# Altium PCB Routed BOARD 3.pcbdoc (part 2 of 7)
Units mil, origin at the board's own origin, x right, y up, seen from the top; angles counter-clockwise.
Board outline 6225 x 7025 mil, 8 copper layers (TopLayer, MidLayer1, MidLayer2, MidLayer3, MidLayer4, MidLayer5, MidLayer6, BottomLayer); 253 components, 548 nets, 2588 pads, 2014 vias.
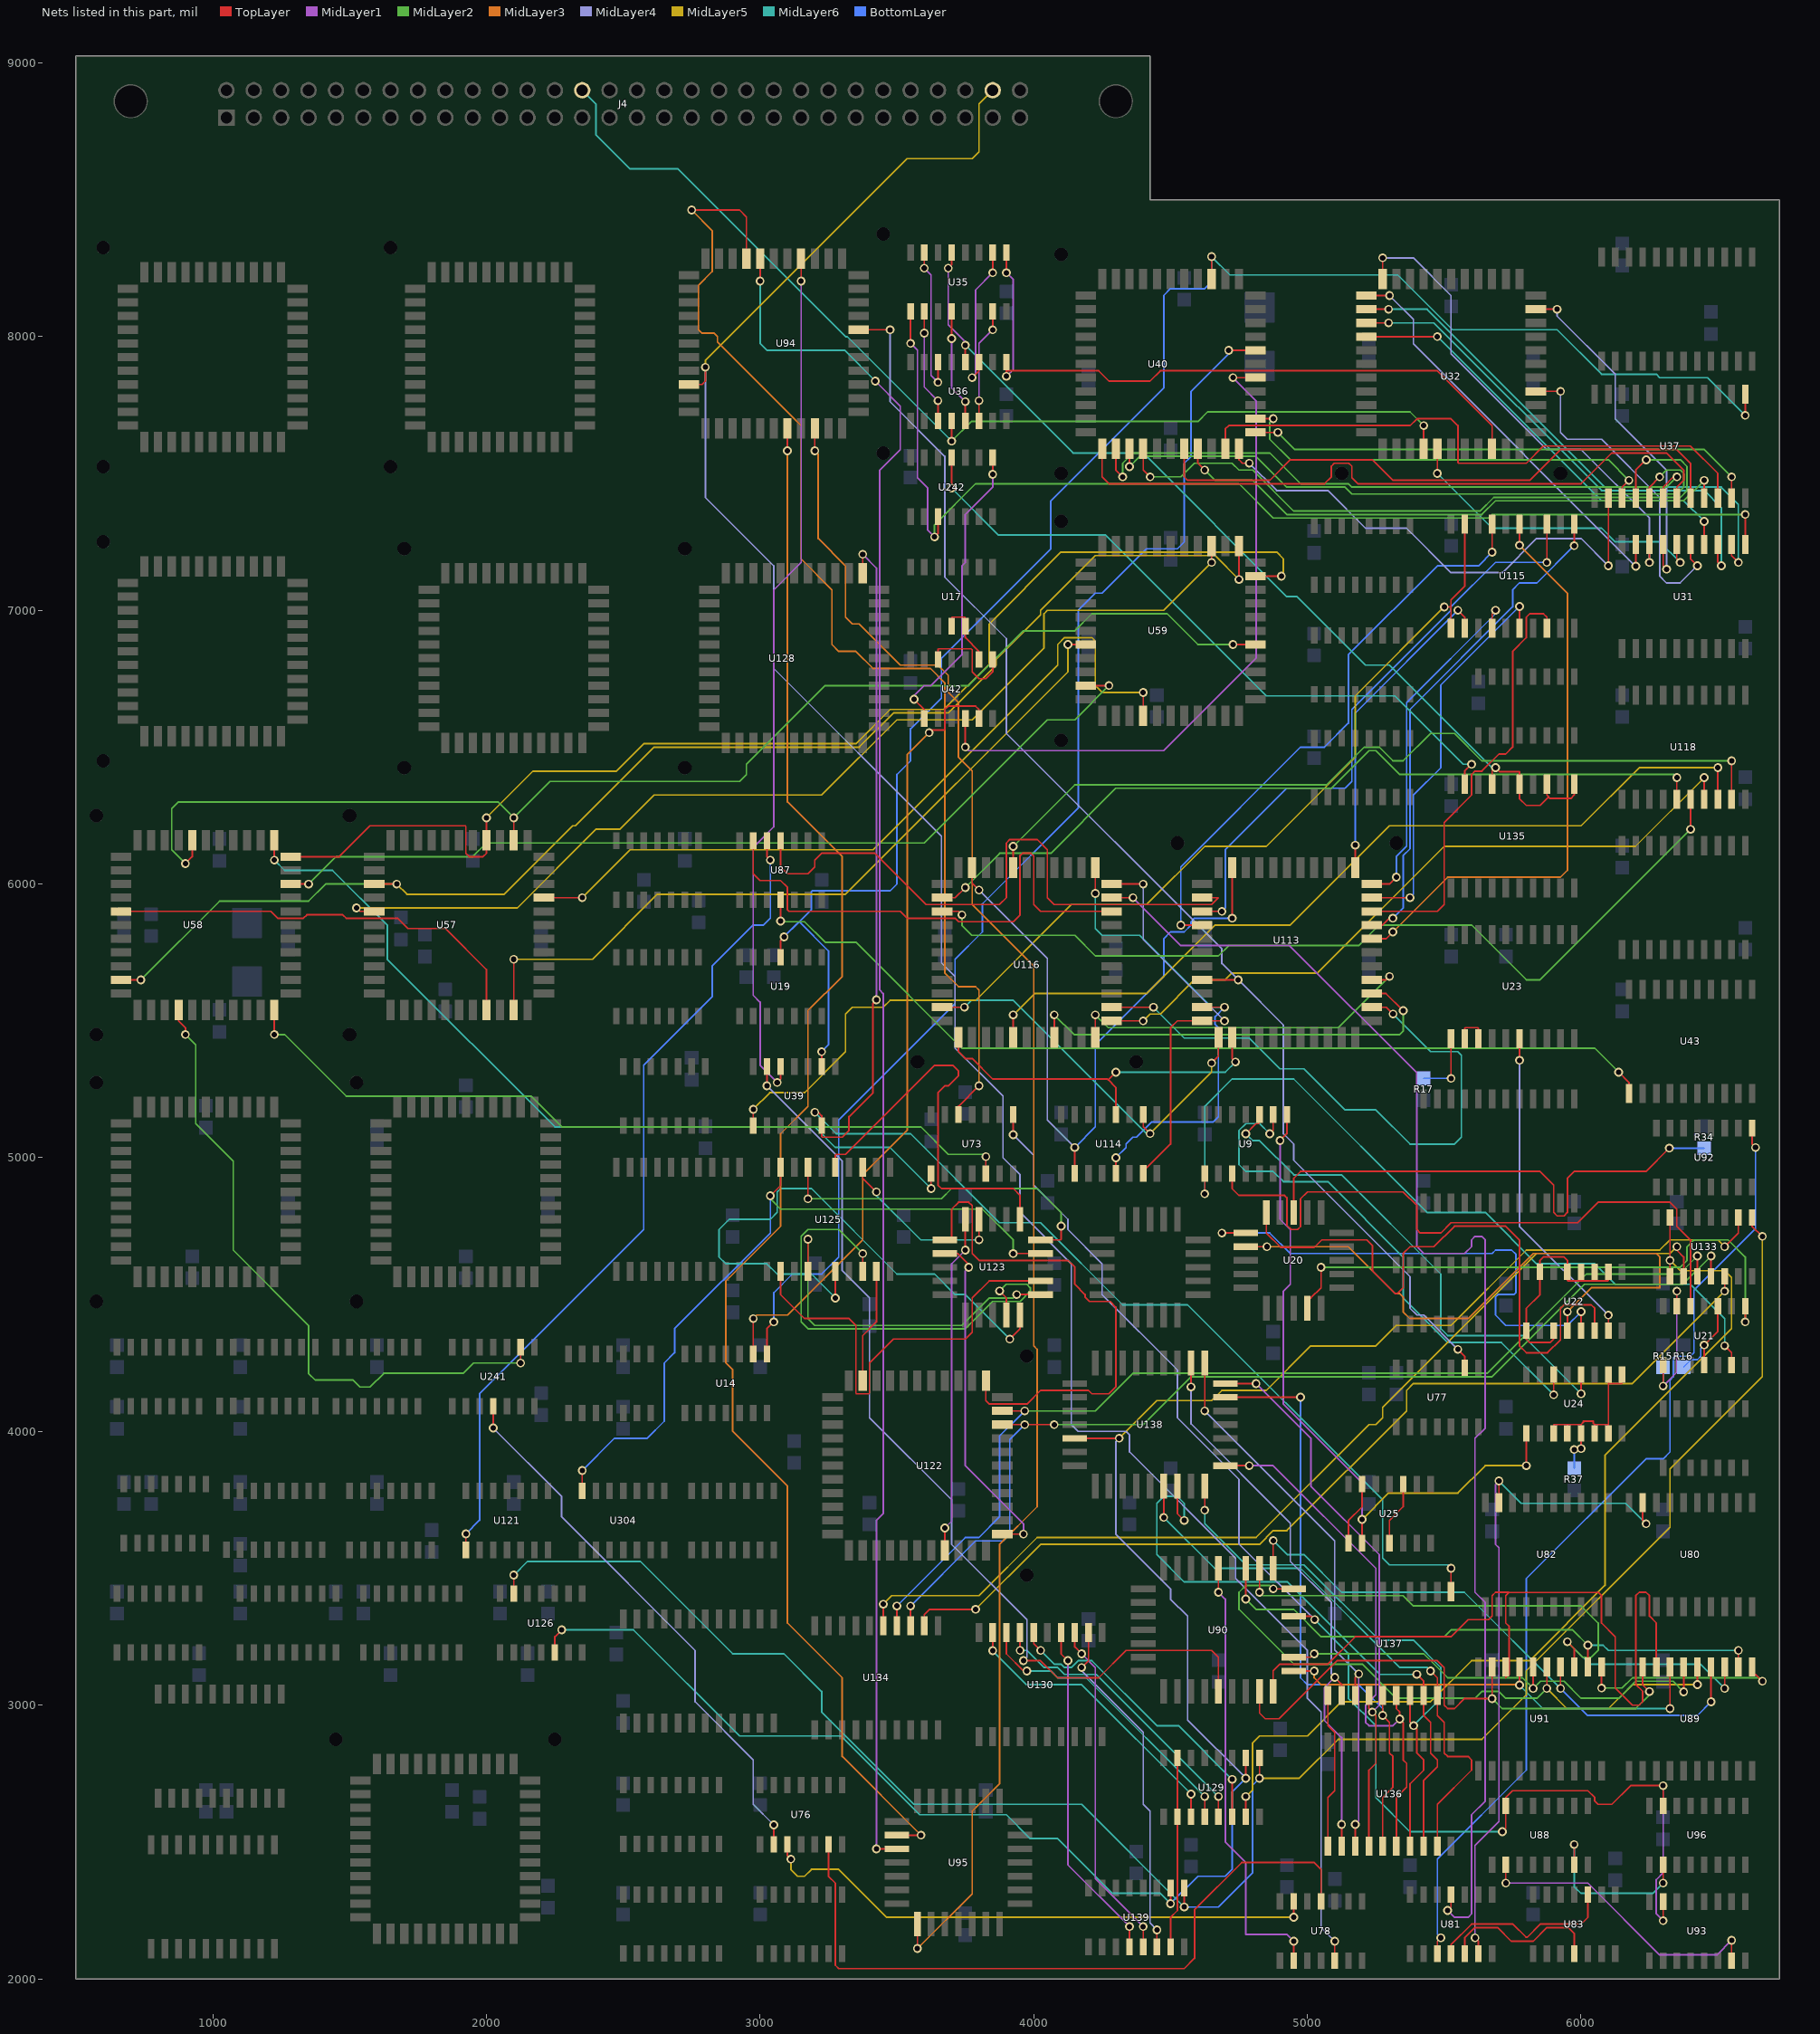
[diagram p8: the nets of this part, all layers, seen from the top]

## Via types
v1: diameter 32, hole 20, TopLayer to BottomLayer, 2014 vias

## Nets (pads, with @x,y where several pads share a name; then routed paths per layer and width w, separated by ;. In a path a pad name is that pad's centre, name@x,y a point inside that pad or via, vN(x,y) a via of type N, cw(c..) or ccw(c..) an arc to the next point about the centre after c; other vN are vias at no path point) (continued)
$11N111: U9.1 U21.6 | length 2878.2
  TopLayer w6: v1(4625,4868) U9.1@4625,4942 ; v1(6525,4313) 6550,4288 U21.6@6550,4242
  MidLayer6 w6: v1(4625,4868) 4625,5187.5 4725,5287.5 4950,5287.5 5437.5,4800 5650,4800 5837.5,4612.5 6050,4612.5 6125,4537.5 6400,4537.5 6525,4412.5 v1(6525,4313)
$11N113: U9.3 U21.12 | length 2462.5
  TopLayer w6: U9.3@4725,4942 4725,4887.5 4750,4862.5 4916.5,4862.5 4925,4854 4925,4753.5 4941,4737.5 4964,4737.5 4975,4748.5 4975,4850 5000,4875 5350,4875 5400,4825 5400,4737.5 5412.5,4725 5487.5,4725 5525,4762.5 5987.5,4762.5 6062.5,4837.5 6325,4837.5 6350,4812.5 6350,4750 6400,4700 U21.12@6400,4458
$11N119: R15.2 U21.1 U21.13 | length 642.7
  TopLayer w6: U21.13@6350,4458 v1(6350,4512.5) ; v1(6300,4166) U21.1@6300,4242 v1(6300,4166)
  MidLayer1 w6: v1(6300,4166) 6350,4216 v1(6350,4512.5)
  BottomLayer w6: v1(6300,4166) R15.2@6300,4235
  other v1: 6300,4166
$11N122: R16.2 U21.4 U21.10 | length 436
  TopLayer w6: U21.10@6500,4458 6500,4366 v1(6450,4316) ; v1(6450,4316) U21.4@6450,4242 v1(6450,4316)
  BottomLayer w6: R16.2@6375,4235 6402.5,4262.5 6425,4262.5 6437.5,4275 6437.5,4303.5 v1(6450,4316)
$11N125: U20.2 U21.8 | length 2120.1
  TopLayer w6: U20.2@5000,4450 5000,4487.5 5012.5,4487.5 5050,4525 v1(5050,4600) ; v1(6600,4400) U21.8@6600,4458
  MidLayer2 w6: v1(5050,4600) 6362.5,4600 6387.5,4625 6387.5,4675 6412.5,4700 6537.5,4700 6600,4637.5 v1(6600,4400)
$11N127: U20.15 U22.4 | length 2312.3
  TopLayer w6: U20.15@4775,4675 v1(4852,4675) ; U22.4@5950,4368 v1(5950,4437)
  MidLayer3 w6: v1(4852,4675) 5150,4675 5321.5,4503.5 5337.5,4503.5 5350,4491 5350,4437.5 5375,4412.5 5587.5,4412.5 5825,4650 6275,4650 6288,4637 6288,4525 6038,4525 v1(5950,4437)
$11N129: U20.14 U22.5 | length 1910.7
  TopLayer w6: v1(4687.5,4725) U20.14@4775,4725 ; U22.5@6000,4368 v1(6000,4437.5)
  BottomLayer w6: v1(4687.5,4725) 4862.5,4725 4937.5,4650 5675,4650 5687.5,4662.5 5746.5,4662.5 5762.5,4646.5 5762.5,4507.5 5755,4500 5696,4500 5687.5,4491.5 5687.5,4425 5725,4387.5 5950,4387.5 v1(6000,4437.5)
$11N131: U20.13 U22.6 | length 2264.6
  TopLayer w6: U20.13@4850,4800 4850,4725 4902.5,4672.5 5025,4672.5 5052.5,4700 5217.5,4700 5237.5,4680 5237.5,4587.5 5321.5,4503.5 5328.5,4503.5 5350,4525 5350,4650 5375,4675 5462.5,4675 5537.5,4750 5725,4750 5775,4700 5775,4312.5 5800,4287.5 5877.5,4287.5 5925,4335 5925,4450 5937.5,4462.5 6037.5,4462.5 6050,4450 U22.6@6050,4368
$11N139: U23.2 U23.3 | length 127.1
  TopLayer w6: U23.2@5575,5435 5575,5472.5 5577.5,5475 5622.5,5475 5625,5472.5 U23.3@5625,5435
$11N163: R17.1 U23.1 | length 245
  TopLayer w6: v1(5525,5290) U23.1@5525,5435
  BottomLayer w6: R17.1@5425,5290 v1(5525,5290)
$11N165: U22.1 U22.3 U22.10 U22.11 U22.12 U22.13 U22.15 | length 950.6
  TopLayer w6: U22.3@5900,4368 5900,4337.5 5887.5,4325 5812.5,4325 5800,4337.5 U22.1@5800,4368 5800,4450 5850,4500 U22.15@5850,4583 5850,4625 5862.5,4637.5 5937.5,4637.5 5950,4625 U22.13@5950,4583 5950,4552.5 5952.5,4550 5997.5,4550 ; U22.10@6100,4583 6100,4552.5 6097.5,4550 6047.5,4550 ; 5997.5,4550 6000,4552.5 ; 5997.5,4550 6000,4552.5 ; 5997.5,4550 6047.5,4550 ; 6000,4552.5 U22.12@6000,4583 6000,4552.5 ; 6047.5,4550 6050,4552.5 ; 6047.5,4550 6050,4552.5 ; 6050,4552.5 U22.11@6050,4583 6050,4552.5
$11N242: R34.1 U20.11 | length 1937
  TopLayer w6: U20.11@4950,4800 4950,4925 4975,4950 5850,4950 5900,4900 5900,4800 5912.5,4787.5 5937.5,4787.5 5950,4800 5950,4925 5975,4950 6237.5,4950 v1(6322.5,5035)
  BottomLayer w6: v1(6322.5,5035) R34.1@6450,5035
$11N244: U22.7 U23.6 | length 1201.6
  TopLayer w6: v1(5775,5356) U23.6@5775,5435 ; U22.7@6100,4368 v1(6100,4425)
  MidLayer4 w6: v1(5775,5356) 5775,4750 v1(6100,4425)
$11N255: U9.10 U24.12 | length 1903.2
  TopLayer w6: v1(4775,5087.5) 4812.5,5125 4822.5,5125 4825,5127.5 U9.10@4825,5158 ; v1(6000,4137.5) U24.12@6000,4208
  MidLayer6 w6: v1(4775,5087.5) 4800,5062.5 4825.5,5062.5 4950.5,4937.5 5125,4937.5 5487.5,4575 5487.5,4375 5512.5,4350 5787.5,4350 v1(6000,4137.5)
$11N257: U9.8 U24.1 U25.2 | length 2607.2
  TopLayer w6: v1(4900,5063) 4925,5088 U9.8@4925,5158 ; v1(5800,3875) U24.1@5800,3993 ; U25.2@5200,3592 v1(5200,3678.5) U25.2@5200,3592
  MidLayer1 w6: v1(4900,5063) 4900,4775 4937.5,4737.5 4937.5,4537.5 4912.5,4512.5 4912.5,4100 5200,3812.5 v1(5200,3678.5)
  MidLayer5 w6: v1(5200,3678.5) 5296.5,3775 5550,3775 5650,3875 v1(5800,3875)
  other v1: 5200,3678.5
$11N266: U25.1 U25.13 | length 236.7
  TopLayer w6: U25.1@5150,3592 5150,3675 5200,3725 U25.13@5200,3808
$11N268: U25.4 U25.10 | length 236.7
  TopLayer w6: U25.4@5300,3592 5300,3675 5350,3725 U25.10@5350,3808
$11N276: R37.2 U24.3 U24.4 U24.5 U24.6 U24.7 U24.9 U24.10 | length 954.2
  TopLayer w6: U24.3@5900,3993 5900,4025 5950,4025 ; v1(6000,3937.5) U24.5@6000,3993 ; U24.9@6150,4208 6150,4177.5 6147.5,4175 6102.5,4175 ; 5950,4025 6000,4025 ; 5950,4025 U24.4@5950,3993 5950,4025 ; U24.5@6000,3993 6000,4025 ; U24.5@6000,3993 6000,4025 ; 6000,4025 6008,4033 6008,4037.5 6044.5,4037.5 6044.5,4030.5 6050,4025 ; 6050,4025 U24.6@6050,3993 6050,4025 ; 6050,4025 6100,4025 U24.7@6100,3993 6100,4172.5 6102.5,4175 ; 6100,4177.5 6102.5,4175 ; 6100,4177.5 U24.10@6100,4208 6100,4177.5 ; 6100,4177.5 6102.5,4175
  MidLayer6 w6: v1(5975,3934) 5978.5,3937.5 v1(6000,3937.5)
  BottomLayer w6: R37.2@5975,3865 v1(5975,3934)
$11N290: U9.9 U24.14 | length 1999.3
  TopLayer w6: v1(4862.5,5087.5) 4875,5100 U9.9@4875,5158 ; v1(5900,4134) U24.14@5900,4208
  MidLayer6 w6: v1(4862.5,5087.5) 4825,5125 4775,5125 4750,5100 4750,4975 4775,4950 4875,4950 4912.5,4912.5 5075,4912.5 5350,4637.5 5350,4487.5 5512.5,4325 5709,4325 v1(5900,4134)
$11N419: U42.8 U42.12 | length 385.9
  TopLayer w6: U42.12@3650,6820.5 3650,6857 3652.5,6859.5 3771,6859.5 3775,6855.5 3775,6775 3800,6750 3825,6750 3850,6775 U42.8@3850,6820.5
$11N424: U17.4 U17.5 U42.9 | length 255.3
  TopLayer w6: U17.4@3700,6942 3700,6972.5 3702.5,6975 3747.5,6975 3750,6972.5 U17.5@3750,6942 3750,6900 3800,6850 U42.9@3800,6820.5
$12N175: U35.5 U36.4 U135.11 U135.13 U135.15 U135.17 | length 3759.7
  TopLayer w6: v1(3687.5,8250) 3700,8262.5 U35.5@3700,8307 ; U135.11@5975,6365 5975,6325 5962.5,6312.5 5887.5,6312.5 5875,6325 ; 5675,6412.5 U135.17@5675,6365 5675,6412.5 ; 5675,6412.5 v1(5687.5,6425) ; 5675,6412.5 v1(5687.5,6425) ; v1(5687.5,6425) 5702.5,6410 5775,6410 U135.15@5775,6365 5775,6312.5 5800,6287.5 5850,6287.5 5881.25,6318.75 5875,6325 ; 5875,6325 U135.13@5875,6365 5875,6325 ; U36.4@3750,7907 v1(3750,7968.5) U36.4@3750,7907
  MidLayer1 w6: v1(3687.5,8250) 3687.5,8043.5 3750,7981 v1(3750,7968.5)
  MidLayer6 w6: v1(3750,7968.5) 4143.5,7575 4400,7575 4925,7050 4962.5,7050 5212.5,6800 5300,6800 5675,6425 v1(5687.5,6425)
  other v1: 3750,7968.5
$12N232: J4.28 U32.32 U36.12 | length 3970
  TopLayer w6: U32.32@5425,7590 v1(5425,7675) ; v1(3700,7618) U36.12@3700,7692 v1(3700,7618)
  MidLayer2 w6: v1(3700,7618) 3772,7690 4600,7690 4635,7725 5375,7725 v1(5425,7675)
  MidLayer6 w6: J4.28@2350,8900 2400,8850 2400,8737.5 2525,8612.5 2700,8612.5 3312.5,8000 3318,8000 v1(3700,7618)
  other v1: 3700,7618
$12N239: U135.19 U242.11 | length 2512.3
  TopLayer w6: v1(3700,7446.5) U242.11@3700,7558 ; U135.19@5575,6365 5575,6412.5 v1(5600,6437.5)
  MidLayer6 w6: v1(3700,7446.5) 3871.5,7275 4262.5,7275 4850,6687.5 5319.5,6687.5 5569.5,6437.5 v1(5600,6437.5)
$12N293: U35.2 U36.3 | length 555.4
  TopLayer w6: v1(3775,7850) 3800,7875 U36.3@3800,7907 ; v1(3850,8233) U35.2@3850,8307
  MidLayer1 w6: v1(3775,7850) 3787.5,7862.5 3787.5,8170.5 v1(3850,8233)
$12N297: U35.7 U36.6 | length 568.7
  TopLayer w6: v1(3600,8250) U35.7@3600,8307 ; v1(3650,7833) U36.6@3650,7907
  MidLayer1 w6: v1(3600,8250) 3625,8225 3625,7858 v1(3650,7833)
$12N299: U35.10 U36.11 | length 420.7
  TopLayer w6: v1(3600,8012.5) U35.10@3600,8092 ; U36.11@3650,7692 v1(3650,7766)
  MidLayer1 w6: v1(3600,8012.5) 3600,7816 v1(3650,7766)
$12N301: U35.12 U36.13 | length 420.7
  TopLayer w6: v1(3700,7993) U35.12@3700,8092 ; U36.13@3750,7692 v1(3750,7762.5)
  MidLayer1 w6: v1(3700,7993) 3700,7812.5 v1(3750,7762.5)
$12N303: U35.15 U36.14 | length 420.7
  TopLayer w6: U36.14@3800,7692 v1(3800,7766) ; v1(3850,8025) U35.15@3850,8092
  MidLayer1 w6: v1(3800,7766) 3800,7975 v1(3850,8025)
$12N312: U32.37 U35.1 U36.1 | length 2530.6
  TopLayer w6: v1(3900,7855) U36.1@3900,7907 3900,7875 4237.5,7875 4275,7837.5 4425,7837.5 4462.5,7875 5475,7875 5675,7675 U32.37@5675,7590 ; v1(3900,8233) U35.1@3900,8307
  MidLayer1 w6: v1(3900,7855) 3925,7880 3925,8208 v1(3900,8233)
$12N316: U31.11 U35.9 U242.3 | length 4254.7
  TopLayer w6: v1(3550,7975) U35.9@3550,8092 ; U31.11@6600,7240 v1(6600,7350) ; 3650,7280.5 v1(3637.5,7268) 3650,7280.5 ; 3650,7280.5 U242.3@3650,7342 3650,7280.5
  MidLayer1 w6: v1(3550,7975) 3575,7950 3575,7484 3612.5,7446.5 3612.5,7293 v1(3637.5,7268)
  MidLayer2 w6: v1(3637.5,7268) 3637.5,7312.5 3787.5,7462.5 4750,7462.5 4875,7337.5 5662.5,7337.5 5675,7350 v1(6600,7350)
  other v1: 3637.5,7268
$12N331: U31.19 U32.18 | length 1525.8
  TopLayer w6: U32.18@5215,8150 v1(5300,8150) ; v1(6200,7161) U31.19@6200,7240
  MidLayer4 w6: v1(5300,8150) 5387.5,8062.5 5387.5,7973.5 v1(6200,7161)
$12N333: U31.18 U32.17 | length 1798
  TopLayer w6: U32.17@5275,8210 v1(5275,8287.5) ; v1(6250,7175) U31.18@6250,7240
  MidLayer4 w6: v1(5275,8287.5) 5387.5,8287.5 5525,8150 5525,7937.5 5875,7587.5 6000,7587.5 6250,7337.5 v1(6250,7175)
$12N335: U31.17 U32.5 | length 1288.4
  TopLayer w6: U32.5@5835,8100 v1(5912.5,8100) ; U31.17@6300,7240 6300,7162.5 v1(6312.5,7150)
  MidLayer4 w6: v1(5912.5,8100) 5912.5,8075 6125,7862.5 6125,7700 6312.5,7512.5 v1(6312.5,7150)
$12N337: U31.16 U32.33 | length 1182.3
  TopLayer w6: v1(5475,7500) U32.33@5475,7590 ; U31.16@6350,7240 6350,7187.5 v1(6362.5,7175)
  MidLayer6 w6: v1(5475,7500) 5675,7300 6075,7300 6125,7250 6287.5,7250 v1(6362.5,7175)
$12N339: U31.15 U32.43 | length 1249.7
  TopLayer w6: U32.43@5835,7800 v1(5925,7800) ; U31.15@6400,7240 6400,7188 v1(6425,7163)
  MidLayer4 w6: v1(5925,7800) 5925,7650 5950,7625 6075,7625 6287.5,7412.5 6287.5,7125 6312.5,7100 6362,7100 v1(6425,7163)
$12N341: U31.14 U32.21 | length 1599.6
  TopLayer w6: U32.21@5215,8000 v1(5475,8000) ; U31.14@6450,7240 v1(6450,7325)
  MidLayer6 w6: v1(5475,8000) 6075,7400 6375,7400 v1(6450,7325)
$12N343: U31.13 U32.20 | length 1872.3
  TopLayer w6: U32.20@5215,8050 v1(5297,8050) ; U31.13@6500,7240 6500,7175 v1(6512.5,7162.5)
  MidLayer6 w6: v1(5297,8050) 5462.5,8050 6075,7437.5 6450,7437.5 6512.5,7375 v1(6512.5,7162.5)
$12N345: U31.12 U32.19 | length 1943
  TopLayer w6: U32.19@5215,8100 v1(5297,8100) ; U31.12@6550,7240 6550,7200 v1(6575,7175)
  MidLayer6 w6: v1(5297,8100) 5437.5,8100 6087.5,7450 6512.5,7450 6575,7387.5 v1(6575,7175)
$12N362: U37.11 U40.7 | length 1884.8
  TopLayer w6: U40.7@4810,7650 v1(4892,7650) ; U37.11@6550,7410 v1(6550,7487.5)
  MidLayer2 w6: v1(4892,7650) 4954.5,7587.5 6450,7587.5 v1(6550,7487.5)
$12N364: U37.2 U40.6 | length 1901.6
  TopLayer w6: U40.6@4750,7590 4750,7550 4762.5,7537.5 v1(4787.5,7537.5) ; v1(6100,7162.5) U37.2@6100,7410
  MidLayer4 w6: v1(4787.5,7537.5) 4887.5,7437.5 5075,7437.5 5212.5,7300 5362.5,7300 5525,7137.5 5712.5,7137.5 5837.5,7262.5 6000,7262.5 v1(6100,7162.5)
$12N366: U37.9 U40.3 | length 2096.9
  TopLayer w6: U40.3@4600,7590 4600,7537.5 v1(4625,7512.5) ; U37.9@6450,7410 v1(6450,7475)
  MidLayer2 w6: v1(4625,7512.5) 4662.5,7475 4800,7475 4925,7350 5637.5,7350 5687.5,7400 6375,7400 v1(6450,7475)
$12N368: U37.10 U40.5 | length 2191.7
  TopLayer w6: U40.5@4700,7590 4700,7662.5 4712.5,7675 5375,7675 5400,7700 5525,7700 5550,7675 5550,7540 5552.5,7537.5 5800,7537.5 5862.5,7600 6400,7600 6500,7500 U37.10@6500,7410
$12N370: U37.8 U40.2 | length 2214.6
  TopLayer w6: U40.2@4550,7590 4550,7487.5 4562.5,7475 4862.5,7475 4937.5,7550 5237.5,7550 5312.5,7475 5812.5,7475 5925,7587.5 6350,7587.5 6400,7537.5 U37.8@6400,7410
$12N372: U37.7 U40.40 | length 2533.1
  TopLayer w6: U40.40@4250,7590 4250,7487.5 4275,7462.5 5062.5,7462.5 5087.5,7487.5 5087.5,7526.5 5098.5,7537.5 5151.5,7537.5 5162.5,7526.5 5162.5,7484 5184,7462.5 6000,7462.5 6112.5,7575 6312.5,7575 6375,7512.5 6375,7475 6350,7450 U37.7@6350,7410
$12N374: U37.6 U40.41 | length 2376.2
  TopLayer w6: U40.41@4300,7590 4300,7512.5 v1(4325,7487.5) ; U37.6@6300,7410 6300,7450 6337.5,7487.5 v1(6350,7487.5)
  MidLayer2 w6: v1(4325,7487.5) 4325,7537.5 4362.5,7575 4862.5,7575 4975,7462.5 5150,7462.5 5162.5,7450 6312.5,7450 v1(6350,7487.5)
$12N376: U37.5 U40.42 | length 2418.9
  TopLayer w6: v1(4350,7525) U40.42@4350,7590 ; U37.5@6250,7410 6250,7450 v1(6287.5,7487.5)
  MidLayer2 w6: v1(4350,7525) 4387.5,7562.5 4812.5,7562.5 4925,7450 5137.5,7450 5162.5,7425 6350,7425 6375,7450 6375,7500 6362.5,7512.5 6312.5,7512.5 v1(6287.5,7487.5)
$12N378: U37.4 U40.43 | length 2602.4
  TopLayer w6: U40.43@4400,7590 4400,7513 v1(4425.5,7487.5) ; U37.4@6200,7410 6200,7512 v1(6238,7550)
  MidLayer2 w6: v1(4425.5,7487.5) 4537.5,7487.5 4587.5,7537.5 4725,7537.5 4750,7512.5 4800,7512.5 4950,7362.5 5631,7362.5 5681,7412.5 6362.5,7412.5 6387.5,7437.5 6387.5,7525 6362.5,7550 v1(6238,7550)
$12N380: U37.3 U40.8 | length 1595.2
  TopLayer w6: U40.8@4810,7700 v1(4875,7700) ; U37.3@6150,7410 6150,7450 v1(6175,7475)
  MidLayer2 w6: v1(4875,7700) 4862.5,7687.5 4862.5,7625 4937.5,7550 6100,7550 v1(6175,7475)
$12N382: U19.11 U37.13 U39.2 U40.20 | length 6624.9
  TopLayer w6: U39.2@3225,5333 v1(3225,5387.5) ; v1(6600,7712.5) U37.13@6600,7790 ; 3075,5794.5 U19.11@3075,5733 3075,5794.5 ; 3075,5794.5 v1(3087.5,5807) 3075,5794.5 ; U40.20@4650,8210 v1(4650,8292) U40.20@4650,8210
  MidLayer6 w6: v1(4650,8292) 4717,8225 5330.5,8225 5530.5,8025 5912.5,8025 6075,7862.5 6275,7862.5 6287.5,7850 6462.5,7850 v1(6600,7712.5)
  BottomLayer w6: v1(3225,5387.5) 3250,5412.5 3250,5755.5 3143,5862.5 v1(3087.5,5807) 3187.5,5907 3187.5,5972.5 3190,5975 3475,5975 3500,6000 3500,6400 3550,6450 3550,6567 3662.5,6679.5 3662.5,6825 4062.5,7225 4062.5,7400 4475,7812.5 4475,8150 4500,8175 4625,8175 4650,8200 v1(4650,8292)
  other v1: 3087.5,5807 4650,8292
$12N497: U14.9 U42.6 | length 2905.1
  TopLayer w6: U14.9@2975,4283 v1(2975,4412.5) ; v1(3618,6553) 3627.5,6562.5 3672.5,6562.5 3675,6565 3675,6637.5 3687.5,6650 3787.5,6650 3800,6637.5 U42.6@3800,6604.5
  MidLayer3 w6: v1(2975,4412.5) 2987.5,4425 3100,4425 3375,4700 3375,4937.5 3537.5,5100 3537.5,6472.5 v1(3618,6553)
$12N503: U14.8 U40.13 | length 4606.7
  TopLayer w6: U14.8@3025,4283 3025,4375 v1(3050,4400) ; v1(4712.5,7950) U40.13@4810,7950
  BottomLayer w6: v1(3050,4400) 3050,4507 3118,4575 3225,4575 3287.5,4637.5 3287.5,5137.5 3712.5,5562.5 3712.5,5725 3812.5,5825 3812.5,5927.5 4162.5,6277.5 4162.5,7000 4225,7062.5 4250,7062.5 4412.5,7225 4525,7225 4550,7250 4550,7537.5 4575,7562.5 4575,7800 4712.5,7937.5 v1(4712.5,7950)
$12N505: U40.11 U42.5 | length 2454
  TopLayer w6: v1(3750,6500) U42.5@3750,6604.5 ; v1(4728,7850) U40.11@4810,7850
  MidLayer1 w6: v1(3750,6500) 3762.5,6487.5 4475,6487.5 4812.5,6825 4812.5,7765.5 v1(4728,7850)
$12N537: U42.2 U242.8 | length 1102.8
  TopLayer w6: v1(3562.5,6675) 3600,6637.5 U42.2@3600,6604.5 ; v1(3850,7497) U242.8@3850,7558
  MidLayer1 w6: v1(3562.5,6675) 3562.5,6687.5 3600,6725 3625,6725 3737.5,6837.5 3737.5,7162.5 3750,7175 3750,7350 3850,7450 v1(3850,7497)
$14N494: U57.5 U59.35 | length 2809.9
  TopLayer w6: U57.5@2100,5540 v1(2100,5725) ; v1(4125,6875) U59.35@4190,6875
  MidLayer5 w6: v1(2100,5725) 2387.5,5725 2625,5962.5 3312.5,5962.5 4125,6775 v1(4125,6875)
$14N504: U57.21 U58.17 U59.16 | length 4571
  TopLayer w6: U58.17@1285,6100 1462.5,6100 1575,6212.5 1922.5,6212.5 1925,6210 1925,6112.5 1937.5,6100 1987.5,6100 2000,6112.5 U57.21@2000,6160 v1(2000,6242) ; U59.16@4810,7125 v1(4905,7125)
  MidLayer5 w6: v1(2000,6242) 2170.5,6412.5 2475,6412.5 2575,6512.5 3350,6512.5 3475,6637.5 3671,6637.5 3837.5,6804 3837.5,6950 4100,7212.5 4887.5,7212.5 4912.5,7187.5 4912.5,7132.5 v1(4905,7125)
$14N518: U57.14 U59.43 | length 2890.5
  TopLayer w6: U57.14@2210,5950 v1(2350,5950) ; U59.43@4400,6615 v1(4400,6700)
  MidLayer5 w6: v1(2350,5950) 2525,6125 3412.5,6125 4087.5,6800 4087.5,6875 4112.5,6900 4212.5,6900 4225,6887.5 4225,6725 4250,6700 v1(4400,6700)
$14N521: U57.33 U59.20 | length 3851.3
  TopLayer w6: v1(1525,5912.5) 1537.5,5900 U57.33@1590,5900 ; v1(4650,7175) U59.20@4650,7235
  MidLayer5 w6: v1(1525,5912.5) 2112.5,5912.5 2400,6200 2487.5,6200 2612.5,6325 3225,6325 3500,6600 3775,6600 4037.5,6862.5 4037.5,6987.5 4050,7000 4475,7000 v1(4650,7175)
$14N660: U58.43 U241.9 | length 2414.2
  TopLayer w6: U58.43@875,5540 875,5500 900,5475 v1(900,5450) ; v1(2125,4250) U241.9@2125,4308
  MidLayer2 w6: v1(900,5450) 937.5,5412.5 937.5,5125 1075,4987.5 1075,4662.5 1350,4387.5 1350,4212.5 1375,4187.5 1512.5,4187.5 1537.5,4162.5 1575,4162.5 1625,4212.5 1915.5,4212.5 1953,4250 v1(2125,4250)
$14N672: U57.31 U58.38 U59.18 | length 5102.5
  TopLayer w6: U58.38@665,5650 v1(737.5,5650) ; v1(4750,7112.5) U59.18@4750,7235 ; U57.31@1590,6000 v1(1672,6000) U57.31@1590,6000
  MidLayer2 w6: v1(737.5,5650) 1025,5937.5 1350,5937.5 1412.5,6000 v1(1672,6000)
  MidLayer5 w6: v1(1672,6000) 1709.5,5962.5 2065,5962.5 2315,6212.5 2325,6212.5 2612.5,6500 3362.5,6500 3487.5,6625 3687.5,6625 3862.5,6800 3862.5,6820.5 4025,6983 4025,6999.5 4225.5,7200 4662.5,7200 v1(4750,7112.5)
  other v1: 1672,6000
$14N674: U57.3 U58.33 | length 1580.9
  TopLayer w6: U58.33@665,5900 1212.5,5900 1237.5,5875 1331.5,5875 1344,5887.5 1475,5887.5 1487.5,5875 1675,5875 1712.5,5837.5 1850,5837.5 2000,5687.5 U57.3@2000,5540
$14N676: U57.19 U58.24 U59.11 | length 4851.8
  TopLayer w6: v1(900,6075) 925,6100 U58.24@925,6160 ; v1(4728,6875) U59.11@4810,6875 ; U57.19@2100,6160 v1(2100,6242) U57.19@2100,6160
  MidLayer2 w6: v1(900,6075) 850,6125 850,6275 875,6300 2042,6300 v1(2100,6242) 2233,6375 2925,6375 2950,6400 2950,6437.5 3237.5,6725 3762.5,6725 3962.5,6925 4150,6925 4212.5,6987.5 4487.5,6987.5 4600,6875 v1(4728,6875)
  other v1: 2100,6242
$14N914: U58.18 U73.1 | length 3097.3
  TopLayer w6: v1(1225,6087.5) U58.18@1225,6160 ; v1(3625,4887.5) U73.1@3625,4942
  MidLayer6 w6: v1(1225,6087.5) 1262.5,6050 1437.5,6050 1637.5,5850 1637.5,5725 2250,5112.5 3200,5112.5 3275,5037.5 3475,5037.5 v1(3625,4887.5)
$14N989: U58.6 U73.5 | length 2936.7
  TopLayer w6: v1(1225,5450) U58.6@1225,5540 ; U73.5@3825,4942 v1(3825,5004)
  MidLayer2 w6: v1(1225,5450) 1262.5,5450 1487.5,5225 2162.5,5225 2275,5112.5 3587.5,5112.5 3687.5,5012.5 3816.5,5012.5 v1(3825,5004)
$14N1063: U58.15 U59.38 | length 3375.3
  TopLayer w6: U58.15@1285,6000 v1(1350,6000) ; U59.38@4190,6725 v1(4275,6725)
  MidLayer2 w6: v1(1350,6000) 1450,6100 1950,6100 2000,6150 3600,6150 4050,6600 4150,6600 v1(4275,6725)
$15N52: U89.12 U90.7 U91.12 | length 2228.9
  TopLayer w6: v1(4775,3387.5) U90.7@4775,3500 ; U89.12@6575,3140 v1(6575,3200) ; U91.12@6025,3140 v1(6025,3219) U91.12@6025,3140
  MidLayer2 w6: v1(4775,3387.5) 4812.5,3350 4950,3350 5050,3250 5500,3250 5525,3275 5969,3275 v1(6025,3219)
  MidLayer6 w6: v1(6025,3219) 6081,3219 6100,3200 v1(6575,3200)
  other v1: 6025,3219
$15N54: U89.13 U90.6 U91.13 | length 2546.2
  TopLayer w6: v1(4825,3412.5) U90.6@4825,3500 ; v1(6525,3061) U89.13@6525,3140 ; 5975,3206.5 U91.13@5975,3140 5975,3206.5 ; 5975,3206.5 v1(5950,3231.5) 5975,3206.5
  MidLayer2 w6: v1(4825,3412.5) 4837.5,3400 5350,3400 5387.5,3362.5 6000,3362.5 6062.5,3300 6062.5,3200 6037.5,3175 6006.5,3175 v1(5950,3231.5)
  MidLayer6 w6: v1(5950,3231.5) 6031.5,3150 6436,3150 v1(6525,3061)
  other v1: 5950,3231.5
$15N56: U89.14 U90.5 U91.14 | length 2272.4
  TopLayer w6: U90.5@4875,3500 v1(4875,3601.5) ; v1(6475,3012.5) U89.14@6475,3140 ; v1(5925,3061) U91.14@5925,3140 v1(5925,3061)
  MidLayer6 w6: v1(4875,3601.5) 4926.5,3550 4987.5,3550 5125,3412.5 5573.5,3412.5 v1(5925,3061)
  BottomLayer w6: v1(5925,3061) 6023.5,2962.5 6425,2962.5 v1(6475,3012.5)
  other v1: 5925,3061
$15N58: U89.15 U90.4 U91.15 | length 2413
  TopLayer w6: v1(4875,3425) U90.4@4950,3425 ; v1(6425,3075) U89.15@6425,3140 ; v1(5875,3061) U91.15@5875,3140 v1(5875,3061)
  MidLayer2 w6: v1(4875,3425) 4862.5,3437.5 4775,3437.5 4750,3412.5 4750,3350 4950,3150 5200,3150 5325,3025 5612.5,3025 5637.5,3050 5700,3050 5725,3025 5839,3025 v1(5875,3061)
  MidLayer5 w6: v1(5875,3061) 5948.5,2987.5 6100,2987.5 6187.5,3075 v1(6425,3075)
  other v1: 5875,3061
$15N60: U89.16 U90.31 U91.16 | length 1811
  TopLayer w6: U90.31@4950,3175 5012.5,3175 v1(5025,3187.5) ; v1(6375,3048.5) U89.16@6375,3140 ; v1(5825,3061) U91.16@5825,3140 v1(5825,3061)
  MidLayer2 w6: v1(5025,3187.5) 5425,3187.5 5512.5,3100 5786,3100 v1(5825,3061) 5851.5,3087.5 5937.5,3087.5 6000,3025 6137.5,3025 6200,3087.5 6336,3087.5 v1(6375,3048.5)
  other v1: 5825,3061
$15N62: U89.17 U90.30 U91.17 | length 2526.6
  TopLayer w6: v1(5775,3073.5) U91.17@5775,3140 ; v1(6325,2987.5) U89.17@6325,3140 ; U90.30@4950,3125 v1(5025,3125) U90.30@4950,3125
  MidLayer3 w6: 5025,3100 5050,3075 ; 5025,3100 v1(5025,3125) 5025,3100 ; 5025,3100 5050,3075 ; 5050,3075 v1@5773.5,3075 ; 5050,3075 v1@5773.5,3075 ; v1@5773.5,3075 v1(5775,3073.5) v1@5773.5,3075
  MidLayer6 w6: v1(5775,3073.5) 5861,2987.5 v1(6325,2987.5)
  other v1: 5775,3073.5 5025,3125
$15N64: U89.18 U90.29 U91.18 | length 3394.3
  TopLayer w6: U90.29@4875,3050 4875,3125 4900,3150 5075,3150 5175,3250 5525,3250 5587.5,3312.5 5662.5,3312.5 5675,3325 5675,3400 5687.5,3412.5 5735.5,3412.5 5736.5,3411.5 ; U89.18@6275,3140 6275,3300 6250,3325 6250,3400 6237.5,3412.5 6212.5,3412.5 6200,3400 6200,3076 6225,3051 6225,3012.5 6212.5,3000 6187.5,3000 6125,3062.5 6125,3250 6075,3300 6075,3400 6063.5,3411.5 5736.5,3411.5 ; 5725,3100 U91.18@5725,3140 5725,3100 ; 5725,3100 5737.5,3112.5 ; 5725,3100 5737.5,3112.5 ; 5725,3300 5737.5,3287.5 ; 5725,3300 5725,3400 ; 5725,3300 5737.5,3287.5 ; 5725,3300 5725,3400 ; 5725,3400 5736.5,3411.5 ; 5725,3400 5736.5,3411.5 ; 5737.5,3112.5 5737.5,3287.5 ; 5737.5,3112.5 5737.5,3287.5
$15N66: U89.19 U90.28 U91.19 | length 2150.4
  TopLayer w6: U90.28@4825,3050 4825,2971 4846,2950 4896,2950 5108.5,3162.5 5475,3162.5 5500,3137.5 5500,3000 5512.5,2987.5 5537.5,2987.5 5575,3025 5576,3024 v1(5675,3024) ; U89.19@6225,3140 6225,3075 v1(6250,3050) ; v1(5675,3024) U91.19@5675,3140 v1(5675,3024)
  MidLayer2 w6: v1(5675,3024) 5711.5,2987.5 6200,2987.5 6250,3037.5 v1(6250,3050)
$15N93: U89.11 U91.11 | length 761.1
  TopLayer w6: v1(6075,3062.5) U91.11@6075,3140 ; U89.11@6625,3140 6625,3112.5 6637.5,3112.5 v1(6662.5,3087.5)
  MidLayer2 w6: v1(6075,3062.5) 6150,3062.5 6187.5,3100 6650,3100 v1(6662.5,3087.5)
$15N97: J4.58 U78.5 U94.15 | length 10164
  TopLayer w6: U94.15@2740,7825 2787.5,7825 2800,7837.5 v1(2800,7888) ; U78.5@5100,2067 v1(5100,2137.5)
  MidLayer4 w6: v1(2800,7888) 2800,7412.5 3050,7162.5 3050,6787.5 3662.5,6175 3662.5,5712.5 3712.5,5662.5 3712.5,5400 3887.5,5225 3887.5,5000 3950,4937.5 3950,4800 4137.5,4612.5 4137.5,4025 4162.5,4000 4337.5,4000 4350,3987.5 4350,3925 4737.5,3537.5 4737.5,3462.5 5000,3200 5000,3025 5050,2975 5050,2187.5 v1(5100,2137.5)
  MidLayer5 w6: 2800,7912.5 3537.5,8650 ; 2800,7912.5 v1(2800,7888) 2800,7912.5 ; 2800,7912.5 3537.5,8650 ; 3537.5,8650 3775,8650 ; 3537.5,8650 3775,8650 ; 3775,8650 3800,8675 ; 3775,8650 3800,8675 ; 3800,8675 3800,8850 ; 3800,8675 3800,8850 ; 3800,8850 J4.58@3850,8900 3800,8850
  other v1: 2800,7888
$15N99: U73.8 U88.7 U90.2 U93.7 U96.7 | length 5225.6
  TopLayer w6: v1(3925,5084) U73.8@3925,5158 ; v1(5712.5,2537.5) 5725,2550 U88.7@5725,2632 5725,2662.5 5750,2687.5 6025,2687.5 6050,2662.5 6050,2650 6062.5,2637.5 6112.5,2637.5 6181,2706 v1(6300,2706) ; v1(6300,2212.5) U93.7@6300,2282 ; 5014,3325 v1(5026.5,3312.5) 5014,3325 ; 5014,3325 U90.2@4950,3325 5014,3325 ; v1(6300,2706) U96.7@6300,2632 v1(6300,2706)
  MidLayer1 w6: v1(6300,2212.5) 6275,2237.5 6275,2362.5 6300,2387.5 v1(6300,2706)
  MidLayer4 w6: v1(3925,5084) 4000,5009 4000,4900 4125,4775 4125,4737.5 4250,4612.5 4250,4500 4525,4225 4525,4050 4750,3825 4750,3589 v1(5026.5,3312.5)
  MidLayer6 w6: v1(5026.5,3312.5) 5150,3189 5150,3025 5250,2925 5250,2662.5 5375,2537.5 v1(5712.5,2537.5)
  other v1: 5026.5,3312.5
$15N118: U88.10 U93.15 | length 1096.9
  TopLayer w6: v1(5725,2350) U88.10@5725,2417 ; U93.15@6550,2067 v1(6550,2141)
  MidLayer1 w6: v1(5725,2350) 6025,2350 6287.5,2087.5 6496.5,2087.5 v1(6550,2141)
$15N123: U88.15 U96.10 | length 645.4
  TopLayer w6: U88.15@5975,2417 v1(5975,2491) ; v1(6300,2350) U96.10@6300,2417
  MidLayer6 w6: v1(5975,2491) 5975,2337.5 6000,2312.5 6262.5,2312.5 v1(6300,2350)
$15N155: U73.12 U94.3 | length 4397.1
  TopLayer w6: v1(2750,8462.5) 2925,8462.5 2950,8437.5 U94.3@2950,8285 ; U73.12@3725,5158 3725,5188 v1(3800,5263)
  MidLayer3 w6: v1(2750,8462.5) 2825,8387.5 2825,8237.5 2775,8187.5 2775,8025 2787.5,8012.5 2832,8012.5 2844.5,8000 2844.5,7980.5 3150,7675 3150,7187.5 3262.5,7075 3262.5,6875 3287.5,6850 3350,6850 3412.5,6787.5 3622.5,6787.5 3675,6735 3675,5675 3725,5625 3787.5,5625 3800,5612.5 v1(3800,5263)
$15N211: U77.9 U94.35 U113.3 | length 5055.5
  TopLayer w6: U94.35@3360,8025 v1(3475,8025) ; v1(5550,4300) 5575,4275 U77.9@5575,4233 ; U113.3@4615,5650 v1(4747,5650) U113.3@4615,5650
  MidLayer4 w6: v1(3475,8025) 3475,7762.5 3675,7562.5 3675,7121.5 3900,6896.5 3900,6550 4687.5,5762.5 4687.5,5709.5 v1(4747,5650) 4912.5,5484.5 4912.5,5087.5 4950,5050 4950,4990.5 5375,4565.5 5375,4450 5400,4425 5425,4425 v1(5550,4300)
  other v1: 4747,5650
$15N244: U76.3 U78.13 | length 2085.9
  TopLayer w6: U76.3@3100,2492 3100,2450 v1(3112.5,2437.5) ; v1(4950,2225) U78.13@4950,2283
  MidLayer5 w6: v1(3112.5,2437.5) 3112.5,2400 3137.5,2375 3162.5,2375 3187.5,2400 3287.5,2400 3462.5,2225 v1(4950,2225)
$15N262: U76.2 U241.4 | length 2024.6
  TopLayer w6: v1(2025,4012.5) U241.4@2025,4092 ; U76.2@3050,2492 v1(3050,2562.5)
  MidLayer4 w6: v1(2025,4012.5) 2275,3762.5 2275,3687.5 2762.5,3200 2762.5,3012.5 2975,2800 2975,2637.5 v1(3050,2562.5)
$15N284: U80.19 U81.6 U82.19 | length 2621.8
  TopLayer w6: v1(5612.5,2150) 5625,2137.5 U81.6@5625,2092 ; U80.19@6225,3740 6225,3675 v1(6237.5,3662.5) ; U82.19@5700,3740 v1(5700,3819) U82.19@5700,3740
  MidLayer1 w6: v1(5612.5,2150) 5612.5,2487.5 5700,2575 5700,3575 5687.5,3587.5 5687.5,3806.5 v1(5700,3819)
  MidLayer6 w6: v1(5700,3819) 5781.5,3737.5 6162.5,3737.5 v1(6237.5,3662.5)
  other v1: 5700,3819
$15N369: U39.6 U90.25 | length 3484.3
  TopLayer w6: v1(3025,5263) U39.6@3025,5333 ; v1(3962.5,3162.5) 4025,3162.5 4087.5,3100 4237.5,3100 4337.5,3200 4650,3200 4675,3175 U90.25@4675,3050
  MidLayer4 w6: v1(3025,5263) 3300,4988 3300,4587.5 3400,4487.5 3400,4050 3700,3750 3700,3587.5 3975,3312.5 3975,3175 v1(3962.5,3162.5)
$15N394: U81.4 U83.10 | length 696.8
  TopLayer w6: U81.4@5525,2092 5525,2125 5600,2200 5751,2200 5798.5,2152.5 5803.5,2152.5 5851,2200 6000,2200 6025,2225 U83.10@6025,2308
$15N403: U81.5 U83.4 | length 597.9
  TopLayer w6: U81.5@5575,2092 5575,2150 5612.5,2187.5 5695,2187.5 5745,2137.5 5825,2137.5 5875,2187.5 5953.5,2187.5 5975,2166 U83.4@5975,2092
$15N413: U76.6 U78.11 | length 2624.4
  TopLayer w6: U76.6@3250,2492 3250,2375 3275,2350 3275,2050 3287.5,2037.5 4550,2037.5 4587.5,2075 4587.5,2252.5 4760,2425 5025,2425 5050,2400 U78.11@5050,2283
$15N453: U39.5 U94.43 | length 3181.9
  TopLayer w6: v1(3062.5,5275) 3075,5287.5 U39.5@3075,5333 ; v1(3150,8203) U94.43@3150,8285
  MidLayer1 w6: v1(3062.5,5275) 3000,5337.5 3000,5568.5 2975,5593.5 2975,6134 3050,6209 3050,7075 3150,7175 v1(3150,8203)
$15N498: U81.3 U92.9 | length 3581.9
  TopLayer w6: U81.3@5475,2092 5475,2137.5 v1(5487.5,2150) ; U92.9@6625,5108 6625,5050 v1(6637.5,5037.5)
  BottomLayer w6: v1(5487.5,2150) 5475,2162.5 5475,2437.5 5800,2762.5 5800,3462.5 6237.5,3900 6300,3900 6325,3925 6325,4187.5 6337.5,4200 6337.5,4268.5 6344,4275 6399,4275 6412.5,4288.5 6412.5,4516 6637.5,4741 v1(6637.5,5037.5)
$15N557: U94.24 U95.6 | length 5782.5
  TopLayer w6: v1(3100,7583) U94.24@3100,7665 ; U95.6@3500,2525 v1(3588,2525)
  MidLayer3 w6: v1(3100,7583) 3100,6300 3300,6100 3300,5662.5 3175,5537.5 3175,5187.5 3075,5087.5 3075,4750 2875,4550 2875,4250 2900,4225 2900,4000 3100,3800 3100,3300 3300,3100 3300,2812.5 3587.5,2525 v1(3588,2525)
$15N559: U94.2 U95.7 | length 6310
  TopLayer w6: v1(3000,8203) U94.2@3000,8285 ; v1(3425,2475) U95.7@3500,2475
  MidLayer1 w6: v1(3421,7837.5) 3512.5,7746 3512.5,7587.5 3437.5,7512.5 3437.5,5612.5 3450,5600 3450,3700 3425,3675 v1(3425,2475)
  MidLayer6 w6: v1(3000,8203) 3000,7975 3025,7950 3308.5,7950 v1(3421,7837.5)
$15N563: U94.26 U95.12 | length 6256
  TopLayer w6: v1(3200,7583) U94.26@3200,7665 ; v1(3575,2111) U95.12@3575,2200
  MidLayer3 w6: v1(3200,7583) 3212.5,7570.5 3212.5,7262.5 3312.5,7162.5 3312.5,6975 3337.5,6950 3362.5,6950 3512.5,6800 3650,6800 3687.5,6762.5 3687.5,6700 3725,6662.5 3725,6462.5 3775,6412.5 3775,5925 4000,5700 4000,4312.5 4012.5,4300 4012.5,3725 3875,3587.5 3875,2712.5 3775,2612.5 3775,2311 v1(3575,2111)
$15N583: U78.2 U90.9 | length 1634.8
  TopLayer w6: v1(4675,3412.5) U90.9@4675,3500 ; U78.2@4950,2067 v1(4950,2137.5)
  MidLayer1 w6: v1(4675,3412.5) 4700,3387.5 4700,2500 4775,2425 4775,2162.5 4925,2162.5 v1(4950,2137.5)
$17N5: U113.43 U115.17 | length 2152.8
  TopLayer w6: v1(4537.5,5850) U113.43@4615,5850 ; v1(5675,7212.5) U115.17@5675,7315
  BottomLayer w6: v1(4537.5,5850) 4537.5,6062.5 4975,6500 5062.5,6500 5150,6587.5 5150,6837.5 5475,7162.5 5625,7162.5 v1(5675,7212.5)
$17N7: U113.42 U115.13 | length 2213.7
  TopLayer w6: U113.42@4615,5900 v1(4687.5,5900) ; v1(5875,7175) U115.13@5875,7315
  BottomLayer w6: v1(4687.5,5900) 4700,5912.5 4700,6125 4925,6350 5137.5,6350 5162.5,6375 5162.5,6637.5 5525,7000 5525,7012.5 5687.5,7175 v1(5875,7175)
$17N9: U113.24 U115.15 | length 2156
  TopLayer w6: U113.24@5235,5800 5287.5,5800 v1(5312.5,5825) ; v1(5775,7237.5) U115.15@5775,7315
  MidLayer3 w6: v1(5312.5,5825) 5512.5,6025 5925,6025 5950,6050 5950,7062.5 v1(5775,7237.5)
$17N11: U113.25 U115.11 | length 1839.8
  TopLayer w6: U113.25@5235,5850 5275,5850 5300,5875 v1(5312.5,5875) ; v1(5975,7236) U115.11@5975,7315
  BottomLayer w6: v1(5312.5,5875) 5350,5912.5 5350,6104 5375,6129 5375,6637.5 5750,7012.5 5750,7075 5775,7100 5839,7100 v1(5975,7236)
$17N13: U113.26 U115.8 | length 1604.3
  TopLayer w6: U113.26@5235,5900 5475,5900 5500,5925 5500,6225 5600,6325 5600,6400 5612.5,6412.5 5637.5,6412.5 5700,6475 5725,6475 5750,6500 5750,6850 5800,6900 5800,6975 5812.5,6987.5 5862.5,6987.5 5875,6975 U115.8@5875,6935
$17N15: U113.27 U115.6 | length 1448.7
  TopLayer w6: U113.27@5235,5950 v1(5375,5950) ; U115.6@5775,6935 v1(5775,7014)
  BottomLayer w6: v1(5375,5950) 5387.5,5962.5 5387.5,6325 5487.5,6425 5487.5,6726.5 v1(5775,7014)
$17N17: U113.28 U115.4 | length 1295.7
  TopLayer w6: U113.28@5235,6000 5300,6000 v1(5325,6025) ; U115.4@5675,6935 5675,6987.5 v1(5687.5,7000)
  BottomLayer w6: v1(5325,6025) 5325,6101 5362.5,6138.5 5362.5,6662.5 5687.5,6987.5 v1(5687.5,7000)
$17N19: U113.29 U115.2 | length 1170.7
  TopLayer w6: U113.29@5175,6060 v1(5175,6142) ; v1(5550,7000) 5575,6975 U115.2@5575,6935
  BottomLayer w6: v1(5175,6142) 5175,6625 v1(5550,7000)
$17N22: U113.6 U114.7 U116.6 | length 1526.1
  TopLayer w6: U116.6@4285,6000 v1(4400,6000) ; U114.7@4400,4943 4400,4962.5 4412.5,4962.5 4500,5050 4500,5475 4525,5500 U113.6@4615,5500 v1(4697,5500)
  MidLayer4 w6: v1(4400,6000) 4400,5797 v1(4697,5500)
$17N23: U113.7 U114.10 U116.27 | length 1588.3
  TopLayer w6: U116.27@3665,5550 v1(3747,5550) ; v1(4650,5346) 4675,5371 U113.7@4675,5440 ; 4400,5113 U114.10@4400,5158 4400,5113 ; 4400,5113 v1(4425,5088) 4400,5113
  MidLayer5 w6: v1(4425,5088) 4650,5313 v1(4650,5346)
  MidLayer6 w6: v1(3747,5550) 3772,5575 3925,5575 4412,5088 v1(4425,5088)
  other v1: 4425,5088
$17N24: U113.5 U114.5 U116.7 | length 1898.5
  TopLayer w6: v1(4225,5965.5) U116.7@4225,6060 ; U114.5@4300,4943 v1(4300,5000) ; U113.5@4615,5550 v1(4697,5550) U113.5@4615,5550
  MidLayer6 w6: v1(4225,5965.5) 4225,5837.5 4250,5812.5 4387.5,5812.5 4650,5550 v1(4697,5550)
  BottomLayer w6: v1(4300,5000) 4337.5,5037.5 4337.5,5050 4362.5,5075 4375,5075 4431,5131 4656,5131 4675,5150 4675,5475 4662.5,5487.5 4662.5,5515.5 v1(4697,5550)
  other v1: 4697,5550
$17N25: U113.8 U114.12 U116.29 | length 1506.3
  TopLayer w6: U116.29@3725,5440 3725,5387.5 3750,5362.5 3775,5362.5 3850,5287.5 4269.5,5287.5 4300,5257 ; v1(4300,5312.5) 4272.25,5284.75 4300,5257 ; U113.8@4725,5440 4725,5362.5 v1(4737.5,5350) ; 4300,5257 U114.12@4300,5158 4300,5257
  MidLayer6 w6: v1(4300,5312.5) 4700,5312.5 v1(4737.5,5350)
$17N26: U113.38 U114.2 U116.16 | length 2737.3
  TopLayer w6: U116.16@3775,6060 3775,6003 v1(3800,5978) ; v1(4725,5875) U113.38@4725,6060 ; U114.2@4150,4943 v1(4150,5037.5) U114.2@4150,4943
  MidLayer4 w6: v1(3800,5978) 4050,5728 4050,5137.5 v1(4150,5037.5)
  BottomLayer w6: v1(4150,5037.5) 4225,5112.5 4225,5412.5 4475,5662.5 4475,5800 4500,5825 4550,5825 4575,5850 4575,5862.5 4587.5,5875 v1(4725,5875)
  other v1: 4150,5037.5
$17N35: U87.4 U113.41 | length 2316
  TopLayer w6: U87.4@3075,6158 3075,6062.5 3100,6037.5 3175,6037.5 3200,6062.5 3200,6087.5 3225,6112.5 3419,6112.5 3606.5,5925 3875,5925 3900,5950 3900,6150 3912.5,6162.5 4012.5,6162.5 4050,6125 4050,5950 4075,5925 4650,5925 4675,5950 U113.41@4615,5950
$17N53: U113.21 U116.39 | length 1324.3
  TopLayer w6: U116.39@4225,5440 v1(4225,5522) ; U113.21@5235,5650 5287.5,5650 v1(5300,5662.5)
  MidLayer2 w6: v1(4225,5522) 4272,5475 5112.5,5475 v1(5300,5662.5)
$17N54: U113.20 U116.36 | length 1607.9
  TopLayer w6: U116.36@4075,5440 v1(4075,5522) ; U113.20@5235,5600 5287.5,5600 v1(5350,5537.5)
  MidLayer2 w6: v1(4075,5522) 4147,5450 5337.5,5450 5350,5462.5 v1(5350,5537.5)
$17N56: U113.19 U116.41 | length 2194.9
  TopLayer w6: U116.41@4285,5550 v1(4437.5,5550) ; U113.19@5235,5550 5288,5550 v1(5313,5525)
  MidLayer6 w6: v1(4437.5,5550) 4550,5437.5 4787.5,5437.5 4900,5325 4987.5,5325 5137.5,5175 5250,5175 5375,5050 5537.5,5050 5562.5,5075 5562.5,5375 5550,5387.5 5450.5,5387.5 v1(5313,5525)
$17N81: U116.40 U118.17 | length 2612.2
  TopLayer w6: U116.40@4285,5500 v1(4400,5500) ; U118.17@6450,6310 v1(6450,6389)
  MidLayer5 w6: v1(4400,5500) 4425,5525 4462.5,5525 4587.5,5650 4700,5650 4725,5675 5037.5,5675 5500,6137.5 6198.5,6137.5 v1(6450,6389)
$17N82: U116.20 U118.16 | length 3292.1
  TopLayer w6: U116.20@3665,5900 3725,5900 v1(3737.5,5887.5) ; v1(6400,6200) U118.16@6400,6310
  MidLayer2 w6: v1(3737.5,5887.5) 3737.5,5849 3774,5812.5 4150,5812.5 4225,5737.5 4675,5737.5 4712.5,5775 5187.5,5775 5262.5,5850 5600,5850 5800,5650 5850,5650 v1(6400,6200)
$17N175: U39.8 U115.1 U115.19 | length 4306.6
  TopLayer w6: U39.8@2975,5117 v1(2975,5177) ; v1(5500,7012.5) 5525,7012.5 5525,7037.5 ; U115.1@5525,6935 5525,7037.5 ; 5525,7037.5 5575,7087.5 ; 5525,7037.5 5575,7087.5 ; 5575,7087.5 U115.19@5575,7315 5575,7087.5
  MidLayer5 w6: v1(2975,5177) 3035.5,5237.5 3162.5,5237.5 3312.5,5387.5 3312.5,5525 3337.5,5550 3450,5550 3475,5575 3787.5,5575 4137.5,5925 4412.5,5925 4625,6137.5 4850,6137.5 5175,6462.5 5175,6687.5 v1(5500,7012.5)
$17N410: U81.11 U116.5 | length 5001.7
  TopLayer w6: U116.5@4285,5950 v1(4362.5,5950) ; v1(5512.5,2250) 5525,2262.5 U81.11@5525,2308
  MidLayer1 w6: v1(4362.5,5950) 4537.5,5775 4935,5775 5400,5310 5400,4675 5425,4650 5575,4650 5600,4675 5600,4700 5612.5,4712.5 5637.5,4712.5 5650,4700 5650,4012.5 5612.5,3975 5612.5,3412.5 5650,3375 5650,2650 5600,2600 5600,2237.5 5587.5,2225 5537.5,2225 v1(5512.5,2250)
$17N422: U116.33 U118.18 | length 3146
  TopLayer w6: U116.33@3925,5440 v1(3925,5522) ; U118.18@6500,6310 v1(6500,6425)
  MidLayer5 w6: v1(3925,5522) 4003,5600 4412.5,5600 4662.5,5850 4937.5,5850 5300,6212.5 6000,6212.5 6212.5,6425 v1(6500,6425)
$17N423: U116.13 U118.19 | length 3096.2
  TopLayer w6: U116.13@3925,6060 v1(3925,6137.5) ; U118.19@6550,6310 v1(6550,6450)
  MidLayer2 w6: v1(3925,6137.5) 4150,6362.5 5070.5,6362.5 5208,6500 5262.5,6500 5312.5,6450 5350,6450 5450,6550 5537.5,6550 5637.5,6450 v1(6550,6450)
$17N521: U116.19 U118.15 | length 3027.4
  TopLayer w6: U116.19@3665,5950 3713,5950 v1(3750,5987) ; U118.15@6350,6310 v1(6350,6389)
  MidLayer2 w6: v1(3750,5987) 3875.5,6112.5 4062.5,6112.5 4300,6350 5087.5,6350 5225,6487.5 5250.5,6487.5 5338,6400 6339,6400 v1(6350,6389)
$17N580: U87.5 U121.1 | length 3079
  TopLayer w6: U121.1@1925,3567 v1(1925,3625.5) ; U87.5@3025,6158 3025,6100 v1(3037.5,6087.5)
  BottomLayer w6: v1(1925,3625.5) 1975,3675.5 1975,4137.5 2575,4737.5 2575,5337.5 2825,5587.5 2825,5700 2975,5850 3012.5,5850 3037.5,5875 v1(3037.5,6087.5)
$17N584: U87.6 U116.4 | length 1973.1
  TopLayer w6: U87.6@2975,6158 2975,6037.5 3000,6012.5 3075,6012.5 3100,5987.5 3100,5905 3105,5900 3512.5,5900 3537.5,5875 3712.5,5875 3725,5862.5 3925,5862.5 3950,5887.5 3950,6104 3958.5,6112.5 3989,6112.5 4000,6101.5 4000,5925 4025,5900 U116.4@4285,5900
$18N8: U43.1 U87.11 | length 3461.4
  TopLayer w6: v1(3075,5865) U87.11@3075,5942 ; v1(6137.5,5312.5) 6175,5275 U43.1@6175,5235
  MidLayer2 w6: v1(3075,5865) 3077.5,5862.5 3162.5,5862.5 3237.5,5787.5 3350,5787.5 3737.5,5400 6050,5400 v1(6137.5,5312.5)
$18N9: U126.13 U129.1 U133.1 U139.1 | length 7267.6
  TopLayer w6: U126.13@2100,3408 v1(2100,3475) ; U133.1@6625,4782 6625,4750 v1(6662.5,4712.5) ; v1(4550,2262.5) U139.1@4550,2332 v1(4550,2262.5) ; v1(4825,2733) U129.1@4825,2807 v1(4825,2733)
  MidLayer5 w6: v1(4825,2733) 4970.5,2733 5112.5,2875 5637.5,2875 5800,3037.5 5800,3125 6325,3650 6325,3862.5 6662.5,4200 v1(6662.5,4712.5)
  MidLayer6 w6: v1(2100,3475) 2150,3525 2562.5,3525 2900,3187.5 3087.5,3187.5 3225,3050 3225,2975 3562.5,2637.5 4175,2637.5 v1(4550,2262.5)
  BottomLayer w6: v1(4550,2262.5) 4675,2262.5 4800,2387.5 4800,2708 v1(4825,2733)
  other v1: 4550,2262.5 4825,2733
$18N11: U126.5 U129.2 U133.2 U138.2 U139.2 | length 8044.9
  TopLayer w6: U126.5@2250,3192 2250,3250 v1(2275,3275) ; v1(6525,4675) 6575,4725 U133.2@6575,4782 ; U138.2@4150,3975 v1(4312.5,3975) U138.2@4150,3975 ; v1(4500,2275) U139.2@4500,2332 v1(4500,2275) ; v1(4775,2733) U129.2@4775,2807 v1(4775,2733)
  MidLayer4 w6: v1(4312.5,3975) 4300,3962.5 4300,3625 4500,3425 4500,3387.5 4562.5,3325 4562.5,2945.5 v1(4775,2733)
  MidLayer5 w6: v1(4312.5,3975) 4450,4112.5 4650,4112.5 4687.5,4150 4850,4150 5012.5,4312.5 5250,4312.5 5325,4387.5 5525,4387.5 5800,4662.5 6287.5,4662.5 6325,4700 6500,4700 v1(6525,4675)
  MidLayer6 w6: v1(2275,3275) 2537.5,3275 2925,2887.5 3295.5,2887.5 3583,2600 3900,2600 3987.5,2512.5 4087.5,2512.5 4287.5,2312.5 4462.5,2312.5 v1(4500,2275)
  BottomLayer w6: v1(4500,2275) 4600,2375 4700,2375 4725,2400 4725,2683 v1(4775,2733)
  other v1: 4500,2275 4775,2733 4312.5,3975
$18N14: U130.2 U139.14 | length 1272.3
  TopLayer w6: v1(4175,3137.5) 4200,3162.5 U130.2@4200,3265 ; U139.14@4450,2117 v1(4450,2179)
  MidLayer4 w6: v1(4175,3137.5) 4175,3125 4400,2900 4400,2637.5 4425,2612.5 4425,2204 v1(4450,2179)
$18N15: U130.3 U139.13 | length 1251.6
  TopLayer w6: U130.3@4150,3265 4150,3212.5 v1(4175,3187.5) ; U139.13@4400,2117 v1(4400,2191)
  MidLayer1 w6: v1(4175,3187.5) 4225,3137.5 4225,2366 v1(4400,2191)
$18N21: U129.7 U129.10 U139.15 | length 700.4
  TopLayer w6: U139.15@4500,2117 4500,2225 4525,2250 U129.10@4525,2592 U129.7@4525,2807
$18N22: U133.14 U134.2 | length 3553.2
  TopLayer w6: U134.2@3600,3290 3600,3330 3620,3350 v1(3787.5,3350) ; v1(6525,4512.5) U133.14@6525,4567
  MidLayer5 w6: v1(3787.5,3350) 4025,3587.5 4825,3587.5 4875,3637.5 4925,3637.5 5362.5,4075 5362.5,4150 5387.5,4175 6187.5,4175 v1(6525,4512.5)
$18N23: U129.15 U133.7 U133.10 | length 3746
  TopLayer w6: U129.15@4775,2592 v1(4775,2666) ; U133.10@6325,4567 U133.7@6325,4782 v1(6325,4625)
  MidLayer5 w6: v1(4775,2666) 4800,2691 4800,2862.5 4825,2887.5 5000,2887.5 5125,3012.5 5450,3012.5 5600,3162.5 5812.5,3162.5 6087.5,3437.5 6087.5,3912.5 6550,4375 6550,4562.5 6525,4587.5 6362.5,4587.5 v1(6325,4625)
$18N39: U123.12 U125.3 | length 640.5
  TopLayer w6: U125.3@3375,4965 3375,4925 v1(3425,4875) ; v1(3800,4700) U123.12@3800,4775
  MidLayer6 w6: v1(3425,4875) 3425,4862.5 3587.5,4700 v1(3800,4700)
$18N40: U123.9 U125.5 | length 1497
  TopLayer w6: U125.5@3275,4965 3275,5010 3277.5,5012.5 3312.5,5012.5 3637.5,5337.5 3703.5,5337.5 3725,5316 3725,5300 3687.5,5262.5 3675,5262.5 3650,5237.5 3650,4900 3662.5,4887.5 3925,4887.5 3950,4862.5 U123.9@3950,4775
$18N41: U123.8 U125.7 | length 1265.3
  TopLayer w6: v1(3175,4850) U125.7@3175,4965 ; U123.8@4025,4700 4097.5,4700 4100,4702.5 v1(4100,4750)
  MidLayer2 w6: v1(3175,4850) 3662.5,4850 3700,4887.5 4012.5,4887.5 4100,4800 v1(4100,4750)
$18N42: U123.7 U125.9 U304.14 | length 2782.5
  TopLayer w6: U304.14@2350,3783 v1(2350,3857) ; v1(3925,4650) U123.7@4025,4650 ; 3075,4898.5 v1(3037.5,4861) 3075,4898.5 ; 3075,4898.5 U125.9@3075,4965 3075,4898.5
  MidLayer2 w6: v1(3037.5,4861) 3037.5,4850 3075,4812.5 3812.5,4812.5 3925,4700 v1(3925,4650)
  BottomLayer w6: v1(2350,3857) 2468,3975 2587.5,3975 2650,4037.5 2650,4250 2687.5,4287.5 2687.5,4375 3037.5,4725 v1(3037.5,4861)
  other v1: 3037.5,4861
$18N43: U123.5 U125.12 | length 1638.7
  TopLayer w6: U125.12@3075,4585 3075,4500 3162.5,4412.5 3325,4412.5 3350,4387.5 3350,4140 3352.5,4137.5 3397.5,4137.5 3400,4140 3400,4250 3487.5,4337.5 3750,4337.5 3775,4362.5 3775,4487.5 3837.5,4550 U123.5@4025,4550
$18N44: U123.4 U125.14 | length 1313.5
  TopLayer w6: U125.14@3175,4585 v1(3175,4702) ; v1(3937.5,4500) U123.4@4025,4500
  MidLayer2 w6: v1(3175,4702) 3175,4412.5 3200,4387.5 3737.5,4387.5 3837.5,4487.5 3925,4487.5 v1(3937.5,4500)
$18N45: U123.3 U125.16 | length 2184
  TopLayer w6: v1(3275,4487.5) U125.16@3275,4585 ; v1(3912.5,4337.5) 3950,4375 U123.3@3950,4425
  MidLayer6 w6: v1(3275,4487.5) 3187.5,4575 3062.5,4575 3025,4612.5 2875,4612.5 2850,4637.5 2850,4737.5 2887.5,4775 3037.5,4775 3062.5,4800 3062.5,4875 3075,4887.5 3187.5,4887.5 3500,4575 3637.5,4575 3712.5,4500 3750,4500 v1(3912.5,4337.5)
$18N46: U123.2 U125.18 | length 1792.6
  TopLayer w6: U125.18@3375,4585 v1(3375,4650) ; v1(3875,4513) 3900,4488 U123.2@3900,4425
  MidLayer2 w6: v1(3375,4650) 3287.5,4737.5 3175,4737.5 3150,4712.5 3150,4400 3175,4375 3750,4375 3850,4475 3950,4475 3987.5,4512.5 3987.5,4525 3975,4537.5 3899.5,4537.5 v1(3875,4513)
$18N49: U122.29 U123.15 | length 1259.8
  TopLayer w6: U123.15@3675,4650 3722.5,4650 3762.5,4610 v1(3762.5,4600) ; U122.29@3885,3625 v1(3962.5,3625)
  MidLayer1 w6: v1(3762.5,4600) 3750,4587.5 3750,3875 3962.5,3662.5 v1(3962.5,3625)
$18N50: U122.40 U123.14 | length 1931.5
  TopLayer w6: U123.14@3675,4700 3700,4700 3700,4812.5 3725,4837.5 3762.5,4837.5 3775,4825 3775,4650 3800,4625 4125,4625 4150,4600 4150,4537.5 4187.5,4500 4187.5,4491 4203.5,4475 4279,4475 4300,4454 4300,4162.5 4275,4137.5 4212.5,4137.5 4200,4150 4025,4150 3975,4100 3837.5,4100 3825,4112.5 U122.40@3825,4185
$18N51: U122.25 U123.13 | length 1241.1
  TopLayer w6: U122.25@3675,3565 v1(3675,3647) ; v1(3750,4662.5) U123.13@3750,4775
  MidLayer1 w6: v1(3675,3647) 3700,3672 3700,4612.5 v1(3750,4662.5)
$18N71: U136.4 U137.4 U138.20 | length 2145.1
  TopLayer w6: U138.20@4700,4175 v1(4812.5,4175) ; U136.4@5225,2485 5225,2762.5 5250,2787.5 5250,2962.5 5225,2987.5 ; v1(5237.5,2975) 5225,2987.5 ; 5225,2987.5 U137.4@5225,3035 5225,2987.5
  MidLayer1 w6: v1(4812.5,4175) 5012.5,3975 5012.5,3800 5262.5,3550 5262.5,3000 v1(5237.5,2975)
$18N72: U136.5 U137.5 U138.19 | length 2325.2
  TopLayer w6: U138.19@4700,4125 v1(4975,4125) ; U136.5@5275,2485 5275,2662.5 5312.5,2700 5312.5,2812.5 5300,2825 5300,2937.5 v1(5275,2962.5) ; v1(5275,2962.5) U137.5@5275,3035 v1(5275,2962.5)
  BottomLayer w6: v1(4975,4125) 4975,3100 5000,3075 5187.5,3075 5275,2987.5 v1(5275,2962.5)
$18N73: U136.2 U137.2 U138.22 | length 2177.6
  TopLayer w6: v1(4575,4162.5) U138.22@4575,4250 ; U136.2@5125,2485 v1(5125,2564) ; 5125,3076.5 U137.2@5125,3035 5125,3076.5 ; 5125,3076.5 v1(5100,3101.5) 5125,3076.5
  MidLayer1 w6: v1(5100,3101.5) 5062.5,3064 5062.5,2944 5125,2881.5 v1(5125,2564)
  MidLayer4 w6: v1(4575,4162.5) 4575,4027.5 4937.5,3665 4937.5,3525 5087.5,3375 5087.5,3114 v1(5100,3101.5)
  other v1: 5100,3101.5
$18N90: U136.3 U137.3 U138.21 | length 2171.5
  TopLayer w6: v1(4625,4075) U138.21@4625,4250 ; U136.3@5175,2485 v1(5175,2564) ; 5175,3101.5 v1(5187.5,3114) 5175,3101.5 ; 5175,3101.5 U137.3@5175,3035 5175,3101.5
  MidLayer1 w6: v1(5175,2564) 5187.5,2576.5 v1(5187.5,3114)
  MidLayer4 w6: v1(4625,4075) 5100,3600 5100,3201.5 v1(5187.5,3114)
  other v1: 5187.5,3114
$18N98: U130.4 U139.12 | length 1251.6
  TopLayer w6: U130.4@4100,3265 4100,3187.5 v1(4125,3162.5) ; U139.12@4350,2117 v1(4350,2191)
  MidLayer1 w6: v1(4125,3162.5) 4125,2416 v1(4350,2191)
$18N99: U129.14 U130.6 | length 1128.2
  TopLayer w6: U130.6@4000,3265 4000,3225 v1(4025,3200) ; U129.14@4725,2592 v1(4725,2729)
  MidLayer6 w6: v1(4025,3200) 4075,3150 4100,3150 4112.5,3137.5 4137.5,3137.5 4162.5,3162.5 4212.5,3162.5 4450,2925 4529,2925 v1(4725,2729)
$18N100: U129.13 U130.7 | length 1085.2
  TopLayer w6: v1(3950,3200) U130.7@3950,3265 ; U129.13@4675,2592 v1(4675,2666)
  MidLayer6 w6: v1(3950,3200) 3975,3200 4037.5,3137.5 4087.5,3137.5 4112.5,3112.5 4228.5,3112.5 v1(4675,2666)
$18N101: U129.12 U130.8 | length 1092.5
  TopLayer w6: U130.8@3900,3265 3900,3187.5 3962.5,3125 v1(3975,3125) ; U129.12@4625,2592 v1(4625,2666)
  MidLayer6 w6: v1(3975,3125) 4062.5,3125 4087.5,3100 4191,3100 v1(4625,2666)
$18N102: U129.11 U130.9 | length 1091
  TopLayer w6: v1(3850,3199) U130.9@3850,3265 ; U129.11@4575,2592 v1(4575,2675)
  MidLayer6 w6: v1(3850,3199) 3974,3075 4175,3075 v1(4575,2675)
$18N103: U122.37 U133.13 U134.3 | length 3967.5
  TopLayer w6: U134.3@3550,3290 v1(3550,3362.5) ; v1(3967,4025) U122.37@3885,4025 v1(4075,4025) ; U133.13@6475,4567 v1(6475,4641)
  MidLayer2 w6: v1(4075,4025) 4400,4025 4575,4200 5675,4200 6012.5,4537.5 6371.5,4537.5 v1(6475,4641)
  BottomLayer w6: v1(3550,3362.5) 3787.5,3600 3887.5,3600 3912.5,3625 3912.5,3970.5 v1(3967,4025)
$18N104: U122.38 U133.12 U134.4 | length 3938.2
  TopLayer w6: U134.4@3500,3290 v1(3500,3362.5) ; U133.12@6425,4567 v1(6425,4641) ; U122.38@3885,4075 v1(3967,4075) U122.38@3885,4075
  MidLayer2 w6: v1(3967,4075) 4225,4075 4362.5,4212.5 5657,4212.5 6019.5,4575 6359,4575 v1(6425,4641)
  BottomLayer w6: v1(3500,3362.5) 3750,3612.5 3800,3612.5 3875,3687.5 3875,3983 v1(3967,4075)
  other v1: 3967,4075
$18N105: U133.11 U134.5 | length 3660.3
  TopLayer w6: U134.5@3450,3290 v1(3450,3369) ; v1(6350,4675) 6350,4662.5 6375,4637.5 U133.11@6375,4567
  MidLayer5 w6: v1(3450,3369) 3481,3400 3800,3400 4012.5,3612.5 4812.5,3612.5 5225,4025 5250,4025 5275,4050 5275,4087.5 5837.5,4650 6325,4650 v1(6350,4675)
$18N125: U136.7 U137.7 U138.13 | length 2178
  TopLayer w6: v1(4625,3712.5) U138.13@4625,3800 ; U136.7@5375,2485 5375,2712.5 5425,2762.5 5425,2800 5400,2825 5400,2913 5375,2938 ; v1(5388,2925) 5375,2938 ; 5375,2938 U137.7@5375,3035 5375,2938
  MidLayer6 w6: v1(4625,3712.5) 4625,3662.5 4775,3512.5 4987.5,3512.5 5262.5,3237.5 5387.5,3237.5 5487.5,3137.5 5487.5,3024.5 v1(5388,2925)
$18N142: U122.5 U125.19 | length 420.7
  TopLayer w6: U122.5@3375,4185 3375,4350 3425,4400 U125.19@3425,4585
$18N166: U136.8 U137.8 U138.11 | length 2316.6
  TopLayer w6: U138.11@4525,3800 4525,3700 v1(4550,3675) ; v1(5400,3112.5) 5425,3087.5 U137.8@5425,3035 5425,2962.5 5450,2937.5 5450,2825 5475,2800 5475,2775 5425,2725 U136.8@5425,2485
  MidLayer6 w6: v1(4550,3675) 4550,3737.5 4525,3762.5 4475,3762.5 4450,3737.5 4450,3550 4550,3450 4927.5,3450 5265,3112.5 v1(5400,3112.5)
$18N167: U136.6 U137.6 U138.14 | length 2095.4
  TopLayer w6: U138.14@4700,3875 v1(4787.5,3875) ; U136.6@5325,2485 5325,2662.5 5362.5,2700 5362.5,2787.5 5350,2800 5350,2937 v1(5337.5,2949.5) ; 5325,2987.5 U137.6@5325,3035 5325,2987.5 ; 5325,2987.5 5337.5,2975 ; 5325,2987.5 5337.5,2975 ; v1(5337.5,2949.5) 5337.5,2975 ; v1(5337.5,2949.5) 5337.5,2975
  MidLayer1 w6: v1(4787.5,3875) 4875,3875 5250,3500 5250,3037.5 5212.5,3000 5212.5,2937.5 5225,2925 5313,2925 v1(5337.5,2949.5)
$18N168: U136.9 U137.9 U138.10 | length 2119.2
  TopLayer w6: v1(4475,3686) U138.10@4475,3800 ; v1(5450,3125) 5475,3100 U137.9@5475,3035 5475,2962.5 5500,2937.5 5500,2825 5512.5,2812.5 5587.5,2812.5 5600,2800 5600,2762.5 5475,2637.5 U136.9@5475,2485
  MidLayer6 w6: v1(4475,3686) 4661,3500 4975,3500 5337.5,3137.5 5437.5,3137.5 v1(5450,3125)
$18N169: U136.1 U137.1 | length 570.7
  TopLayer w6: U136.1@5075,2485 5075,2662.5 5100,2687.5 5100,2900 5075,2925 U137.1@5075,3035
$18N211: U39.13 U128.18 U137.11 | length 5678.3
  TopLayer w6: v1(3200,5166) 3212.5,5166 3225,5153.5 U39.13@3225,5117 3225,5077.5 3227.5,5075 3300,5075 3325,5100 3325,5150 3412.5,5237.5 3412.5,5564.5 v1(3425,5577) ; U128.18@3375,7135 v1(3375,7204.5) ; U137.11@5525,3415 v1(5525,3500)
  MidLayer1 w6: v1(3375,7204.5) 3425,7154.5 v1(3425,5577)
  MidLayer6 w6: v1(3200,5166) 3278.5,5087.5 3550,5087.5 3875,4762.5 4025,4762.5 4325,4462.5 4562.5,4462.5 5275,3750 5275,3537.5 5300,3512.5 5512.5,3512.5 v1(5525,3500)